# Altium PCB PCB_SD5_Keypad_v1.PcbDoc
Units mm, origin at the board's own origin, x right, y up, seen from the top; angles counter-clockwise.
Board outline 82 x 42 mm, 2 copper layers (Top Layer, Bottom Layer), stack 1.591 mm thick; 88 components, 63 nets, 280 pads, 263 vias.
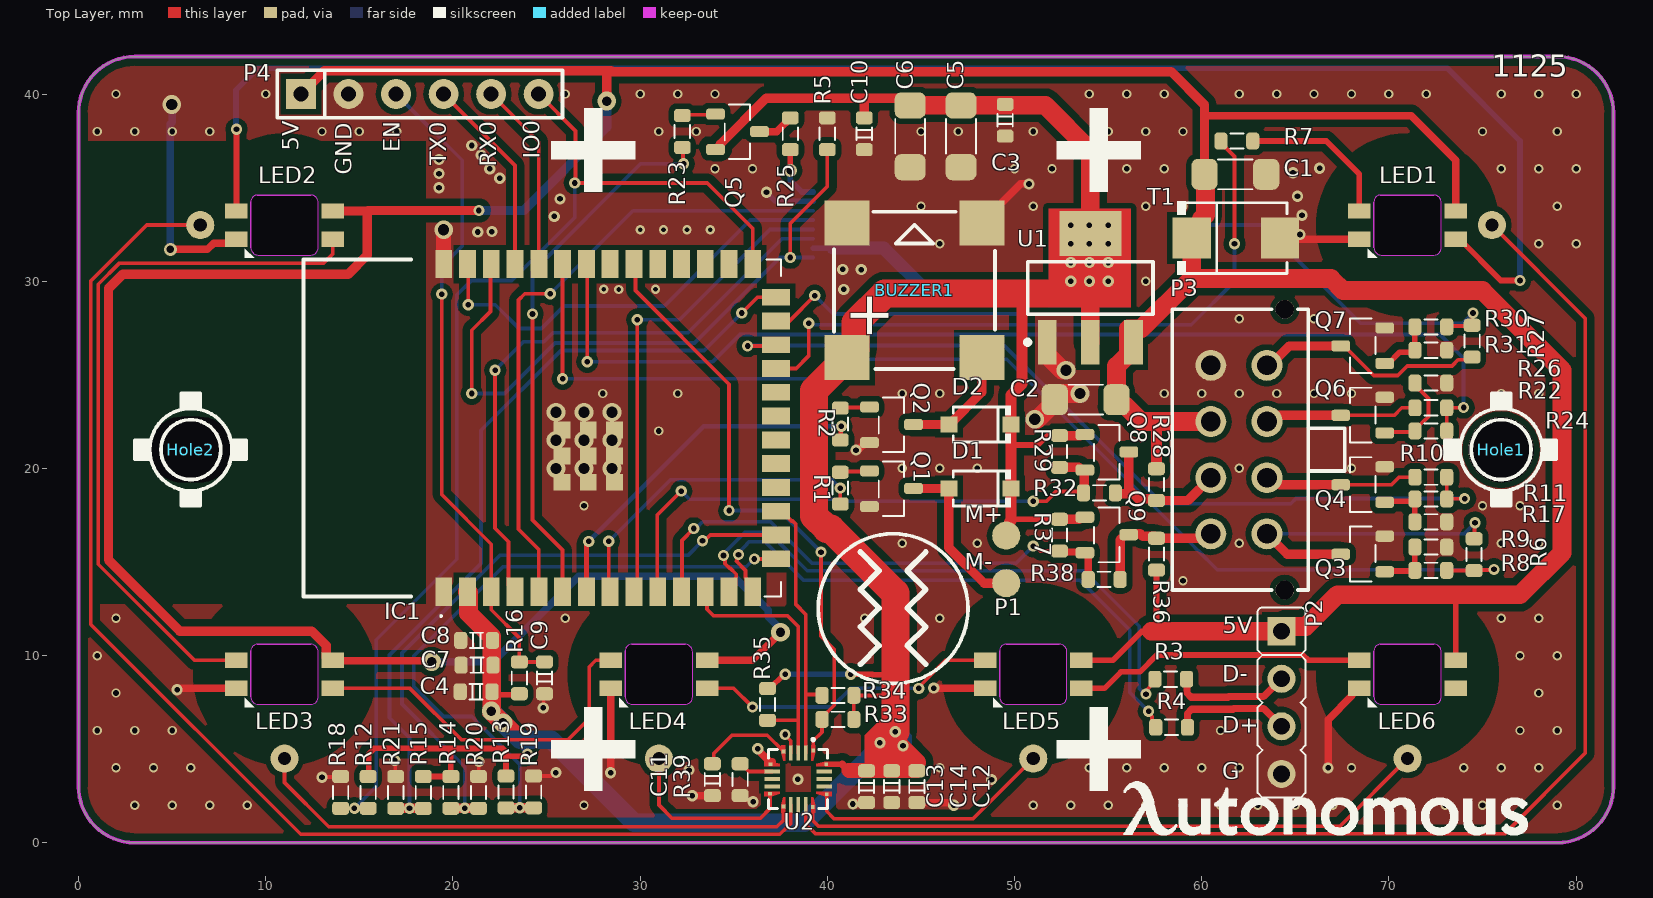
[diagram p0: Top Layer view]
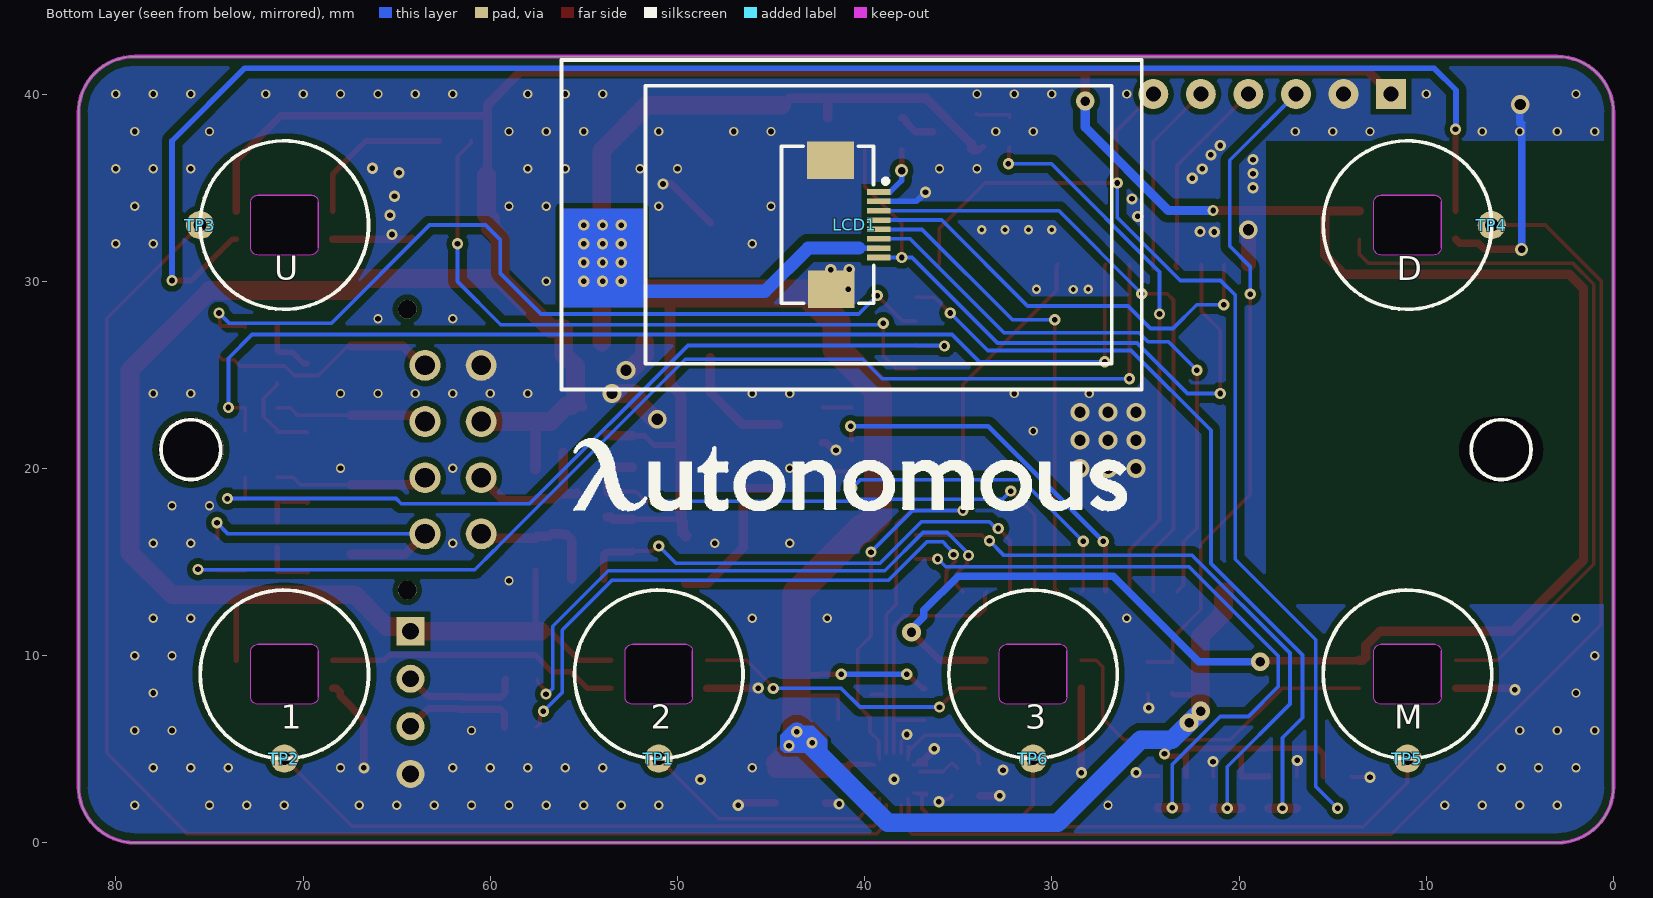
[diagram p1: Bottom Layer view, seen from below]

## Layer stack, top to bottom
Top Solder: solder mask 0.0102, Solder Resist, Dk 3.5
Top Layer: signal copper 0.0356
Dielectric 1: dielectric 1.52, FR-4, Dk 4.8
Bottom Layer: signal copper 0.0356
Bottom Solder: solder mask 0.0102, Solder Resist, Dk 3.5

## Board outline
-0.004,3.004 -0.004,39.004 cw(c2.996,39.004) 2.996,42.004 78.996,42.004 cw(c78.996,39.004) 81.996,39.004 81.996,3.004 cw(c78.996,3.004) 78.996,0.004 2.996,0.004 cw(c2.996,3.004)

## Design rules (kind name [scope] priority, off if disabled: settings)
Clearance [All] p1: gap=0.2 ignorepadtopadclearanceinfootprint=FALSE except(0.3: SMDPad-Poly THPad-Poly Via-Poly Fill-Poly; 0.4: Arc-Poly Track-Poly Poly-Poly)
DiffPairsRouting [All] p1: maxlimit=0.3 minlimit=0.3 mostfreqgap=0.3 toplayer_minwidth=0.2 toplayer_maxwidth=0.2 toplayer_prefwidth=0.2 bottomlayer_minwidth=0.2 bottomlayer_maxwidth=0.2 bottomlayer_prefwidth=0.2 maxuncoupledlength=12.7
HoleSize [All] p1: absolutevalues=TRUE maxlimit=6 minlimit=0.025 maxpercent=80.000 minpercent=20.000
HoleToHoleClearance [All] p1: gap=0.05 allowstackedmicrovias=TRUE
MinimumSolderMaskSliver [All] p1: minsoldermaskwidth=0.05
PlaneConnect [All] p1: planeconnectstyle=Direct reliefexpansion=0.508 reliefentries=4 reliefconductorwidth=0.254 reliefairgap=0.254
PolygonConnect [All] p1: connectstyle=Direct reliefconductorwidth=0.254 reliefentries=4 polygonreliefangle="90 Angle" airgapwidth=0.254
RoutingVias [All] p1: holewidth=0.3 width=0.6 viastyle="Through Hole" minholewidth=0.3 minwidth=0.6 maxholewidth=0.6 maxwidth=1
SilkToSilkClearance [All] p1: silktosilkclearance=0.005
SilkToSolderMaskClearance [IsPad] p1: minsilkscreentomaskgap=0 clearancetoexposedcopper=TRUE
SolderMaskExpansion [All] p1: expansion=0.005 istentingtop=FALSE
Width [All] p1: maxlimit=5 minlimit=0.2 preferedwidth=0.2 minimp=50.000000 maximp=50.000000 favimp=50.000000
23 further rules are at their usual default settings.

## Classes and differential pairs
differential pair USBDR: +USBDR_P -USBDR_N
differential pair USBD: +USBD_P -USBD_N

## Components (designator, comment, footprint, x,y, rotation, side; value= is the part's Value field where it differs from the comment)
BUZZER1 "2731Hz/NC" BUZ-SMD_4P-L8.5-W8.5-P8.50-TL 44.653,29.515 r90 top
C1 "22uF" C-1206 61.798,35.712 r180 top value=33pF
C2 "22uF" C-1206 53.797,23.673 r0 top value=33pF
C3 "10uF" C-0603-2 49.5,38.6 r90 top value=33pF
C4 "0.1uF" C-0603-2 21.238,8.072 r0 top value=33pF
C5 "22uF" C-1206 47.142,37.744 r90 top value=33pF
C6 "22uF" C-1206 44.425,37.744 r90 top value=33pF
C7 "10uF" C-0603-2 21.288,9.494 r0 top value=33pF
C8 "0.1uF" C-0603-2 21.263,10.815 r0 top value=33pF
C9 "1uF" C-0603-2 24.892,8.814 r90 top value=33pF
C10 "0.1uF" C-0603-2 41.971,37.879 r90 top value=33pF
C11 "0.1uF" C-0603-2 33.858,3.373 r270 top value=33pF
C12 "10uF" C-0603-2 44.78,3 r90 top value=33pF
C13 "0.1uF" C-0603-2 42.094,3 r90 top value=33pF
C14 "10uF" C-0603-2 43.44,3 r90 top value=33pF
D1 "1N5819" SOD-123_L2.7-W1.7-LS3.8-RD 48.15,18.928 r180 top value=1N5007
D2 "1N5819" SOD-123_L2.7-W1.7-LS3.8-RD 48.15,22.347 r180 top value=1N5007
Hole1 "Hole" "HOLE 2.6mm"#1 75.996,21.004 r90 top
Hole2 "Hole" "HOLE 2.6mm"#2 5.996,21.004 r180 top
IC1 "ESP32-S3-WROOM-1/NC" ESP32S3WROOM1N8R2 24.767,22.161 r90 top locked
LCD1 "LCD-N114-8P" "LCD-SMD_1.14IPS-LCD - 8PIN" 40.801,33.017 r0 bottom locked
LED1 "SK6812MINI-EA" LED-SMD_4P-L3.2-W2.8_SK6812MINI-EA 71,33 r180 top
LED2 "SK6812MINI-EA" LED-SMD_4P-L3.2-W2.8_SK6812MINI-EA 11,33 r180 top locked
LED3 "SK6812MINI-EA" LED-SMD_4P-L3.2-W2.8_SK6812MINI-EA 11,9 r180 top
LED4 "SK6812MINI-EA" LED-SMD_4P-L3.2-W2.8_SK6812MINI-EA 31,9 r180 top
LED5 "SK6812MINI-EA" LED-SMD_4P-L3.2-W2.8_SK6812MINI-EA 51,9 r180 top
LED6 "SK6812MINI-EA" LED-SMD_4P-L3.2-W2.8_SK6812MINI-EA 71,9 r180 top
P1 "VIBRA/NC" "PAD 2.54" 49.555,16.408 r270 top
P2 "MHDR1X4/NC" HDR1X4 64.262,11.303 r270 top
P3 "BX-MX3.0-2-4PWZ/NC" CONN-TH_8P-P3.00_BX-MX3.0-2-4PZZ 62.896,21.004 r270 top locked
P4 "JP6/NC" JP6-D1T 11.88,40 r0 top
Q1 "8050" SOT-23-V2 42.252,19.863 r270 top
Q2 "8050" SOT-23-V2 42.252,23.282 r270 top
Q3 "8050/NC" SOT-23-V2 69.774,14.482 r90 top
Q4 "8050/NC" SOT-23-V2 69.774,18.191 r90 top
Q5 "A1015" SOT-23-V2 34.025,38.934 r270 top
Q6 "8050/NC" SOT-23-V2 69.774,21.9 r90 top
Q7 "8050/NC" SOT-23-V2 69.774,25.608 r90 top
Q8 "BS138/NC" SOT-23-V2 53.761,21.814 r270 top
Q9 "BS138/NC" SOT-23-V2 53.761,17.395 r270 top
R1 "220" R-0603-2 40.691,18.948 r270 top
R2 "220" R-0603-2 40.691,22.372 r270 top
R3 "22R" R-0603-2 58.344,8.738 r0 top
R4 "22R" R-0603-2 58.395,6.172 r0 top
R5 "10k" R-0603-2 39.996,37.879 r90 top
R6 "0R" R-0603-2 74.549,15.392 r270 top
R7 "220" R-0603-2 61.874,37.49 r0 top
R8 "220/NC" R-0603-2 72.238,14.554 r0 top
R9 "10k/NC" R-0603-2 72.238,15.799 r0 top
R10 "0R" R-0603-2 72.238,19.533 r0 top
R11 "220/NC" R-0603-2 72.238,18.364 r0 top
R12 "10k" R-0603-2 15.469,2.692 r270 top
R13 "10k/NC" R-0603-2 22.835,2.718 r270 top
R14 "10k/NC" R-0603-2 19.888,2.692 r270 top
R15 "10k/NC" R-0603-2 18.415,2.692 r270 top
R16 "10k" R-0603-2 23.546,8.814 r90 top
R17 "10k/NC" R-0603-2 72.238,17.145 r0 top
R18 "10k/NC" R-0603-2 13.995,2.692 r90 top
R19 "10k/NC" R-0603-2 24.308,2.718 r90 top
R20 "10k" R-0603-2 21.361,2.692 r90 top
R21 "10k" R-0603-2 16.942,2.692 r90 top
R22 "0R" R-0603-2 72.238,23.241 r0 top
R23 "220" R-0603-2 32.25,38 r270 top
R24 "220/NC" R-0603-2 72.238,22.002 r0 top
R25 "33R" R-0603-2 38.021,37.879 r270 top
R26 "10k/NC" R-0603-2 72.238,24.562 r0 top
R27 "0R" R-0603-2 74.447,26.797 r90 top
R28 "10k/NC" R-0603-2 57.582,19.135 r270 top
R29 "10k/NC" R-0603-2 52.4,20.904 r270 top
R30 "220/NC" R-0603-2 72.238,27.559 r0 top
R31 "10k/NC" R-0603-2 72.238,26.314 r0 top
R32 "0R" R-0603-2 54.534,18.694 r0 top
R33 "10k" R-0603-2 40.564,6.594 r180 top
R34 "2k2" R-0603-2 40.564,7.873 r180 top
R35 "2k2" R-0603-2 36.805,7.391 r270 top
R36 "10k/NC" R-0603-2 57.582,15.418 r90 top
R37 "10k/NC" R-0603-2 52.4,16.434 r270 top
R38 "0R" R-0603-2 54.788,14.072 r0 top
R39 "75k" R-0603-2 35.339,3.373 r270 top
T1 "TVS Diode" SMB_L4.6-W3.6-LS5.3-RD 61.821,32.304 r0 top
TP1 "2/NC" "TOUCH PAD - 9MM" 51,9 r0 bottom
TP2 "1/NC" "TOUCH PAD - 9MM" 71,9 r0 bottom
TP3 "UP/NC" "TOUCH PAD - 9MM" 71,33 r90 bottom locked
TP4 "DN/NC" "TOUCH PAD - 9MM" 11,33 r270 bottom locked
TP5 "M/NC" "TOUCH PAD - 9MM" 11,9 r0 bottom locked
TP6 "3/NC" "TOUCH PAD - 9MM" 31,9 r0 bottom locked
U1 "LM1117-3.3V-800mA" "SOT223-LM1117 - duplicate" 54.051,29.642 r90 top
U2 "MPR121QR2" QFN-20_L3.0-W3.0-P0.40-BL 38.439,3.411 r180 top

## Footprints (in the part's own frame and the unit in brackets; to place one, negate y for a bottom-side part, rotate by r counter-clockwise, add the part's x,y. Pads: shape width x height; smd on the part's side, far side on the other; paste and mask are expansions set on the pad)
BUZ-SMD_4P-L8.5-W8.5-P8.50-TL [mm]
  rect 2.4x2.4 smd paste+0 mask+0.051: 1(-3.6,3.6) 2(-3.6,-3.6) 3(3.6,-3.6) 4(3.6,3.6)
  silkscreen extent -4.2,-4.3 4.2,4.3, body extent -4.35,-4.35 4.35,4.35, height 3
C-0603-2 [mm]
  rrect50% 0.7x0.9 smd: 1(-0.85,0) 2(0.85,0)
  silkscreen extent -0.35,-0.41 0.35,0.41, body extent -0.8,-0.4 0.8,0.4, height 0.3
C-1206 [mm]
  rrect50% 1.4x1.651 smd: 1(-1.65,0) 2(1.65,0)
  silkscreen extent -0.92,-0.8 0.92,0.8, body extent -1.57,-0.8 1.63,0.8, height 1.02
CONN-TH_8P-P3.00_BX-MX3.0-2-4PZZ [mm]
  round 1.65 hole 1.05 paste+0 mask+0.05: 1(4.5,-2.41) 2(1.5,-2.41) 3(-1.5,-2.41) 4(-4.5,-2.41) 5(4.5,0.59) 6(1.5,0.59) 7(-1.5,0.59) 8(-4.5,0.59)
  round 1 hole 1 unplated paste+0: ""(-7.5,1.539) ""(7.5,1.539)
  silkscreen extent -7.5,-4.47 7.5,4.74
ESP32S3WROOM1N8R2 [mm]
  rect 1.5x0.9 smd: 1(-8.75,5.26) 2(-8.75,3.99) 3(-8.75,2.72) 4(-8.75,1.45) 5(-8.75,0.18) 6(-8.75,-1.09) 7(-8.75,-2.36) 8(-8.75,-3.63) 9(-8.75,-4.9) 10(-8.75,-6.17) 11(-8.75,-7.44) 12(-8.75,-8.71) 13(-8.75,-9.98) 14(-8.75,-11.25) 27(8.75,-11.25) 28(8.75,-9.98) 29(8.75,-8.71) 30(8.75,-7.44) 31(8.75,-6.17) 32(8.75,-4.9) 33(8.75,-3.63) 34(8.75,-2.36) 35(8.75,-1.09) 36(8.75,0.18) 37(8.75,1.45) 38(8.75,2.72) 39(8.75,3.99) 40(8.75,5.26)
  rect 0.9x1.5 smd: 15(-6.985,-12.5) 16(-5.715,-12.5) 17(-4.445,-12.5) 18(-3.175,-12.5) 19(-1.905,-12.5) 20(-0.635,-12.5) 21(0.635,-12.5) 22(1.905,-12.5) 23(3.175,-12.5) 24(4.445,-12.5) 25(5.715,-12.5) 26(6.985,-12.5)
  rect 0.9x0.9 smd: 41(-2.9,-2.46) 41(-2.9,-1.06) 41(-2.9,-3.86) 41(-1.5,-1.06) 41(-1.5,-3.86) 41(-1.5,-2.46) 41(-0.1,-1.06) 41(-0.1,-2.46) 41(-0.1,-3.86)
  silkscreen extent -10.1,5.35 9,12.75, body extent -9,-12.75 9,12.75, height 3.2
HDR1X4 [mm] "Connector; Header; 4 Position"
  rect 1.5x1.5 hole 0.9: 1(0,0)
  round 1.5 hole 0.9: 2(2.54,0) 3(5.08,0) 4(7.62,0)
  silkscreen extent -1.27,-1.28 8.89,1.28, body extent -1.27,-1.27 8.89,1.27, height 8.57
"HOLE 2.6mm"#1 [mm]
  round 3.5 hole 3.5 mask+0.102: 1(0,0)
  Top Layer pour cut-out: -1.75,0 -1.617,0.67 -1.237,1.237 -0.67,1.617 0,1.75 0,1.75 0.67,1.617 1.237,1.237 1.617,0.67 1.75,0 1.75,0 1.617,-0.67 1.237,-1.237 0.67,-1.617 0,-1.75 0,-1.75 -0.67,-1.617 -1.237,-1.237 -1.617,-0.67 -1.75,0
  Bottom Layer pour cut-out: -1.75,0 -1.617,0.67 -1.237,1.237 -0.67,1.617 0,1.75 0,1.75 0.67,1.617 1.237,1.237 1.617,0.67 1.75,0 1.75,0 1.617,-0.67 1.237,-1.237 0.67,-1.617 0,-1.75 0,-1.75 -0.67,-1.617 -1.237,-1.237 -1.617,-0.67 -1.75,0
  silkscreen extent -1.6,-1.6 1.6,1.6
"HOLE 2.6mm"#2 [mm]
  round 3.5 hole 3.5 slot 4.5 at 0 deg mask+0.102: 1(0,0)
  Top Layer pour cut-out: -1.75,0 -1.617,0.67 -1.237,1.237 -0.67,1.617 0,1.75 0,1.75 0.67,1.617 1.237,1.237 1.617,0.67 1.75,0 1.75,0 1.617,-0.67 1.237,-1.237 0.67,-1.617 0,-1.75 0,-1.75 -0.67,-1.617 -1.237,-1.237 -1.617,-0.67 -1.75,0
  Bottom Layer pour cut-out: -1.75,0 -1.617,0.67 -1.237,1.237 -0.67,1.617 0,1.75 0,1.75 0.67,1.617 1.237,1.237 1.617,0.67 1.75,0 1.75,0 1.617,-0.67 1.237,-1.237 0.67,-1.617 0,-1.75 0,-1.75 -0.67,-1.617 -1.237,-1.237 -1.617,-0.67 -1.75,0
  silkscreen extent -1.6,-1.6 1.6,1.6
JP6-D1T [mm] "6 pins, 1 row, straight, gold plating"
  rect 1.6x1.6 hole 0.8: 1(0,0)
  round 1.6 hole 0.8: 2(2.54,0) 3(5.08,0) 4(7.62,0) 5(10.16,0) 6(12.7,0)
  silkscreen extent -1.27,-1.27 13.97,1.27, body extent -1.27,-1.27 13.97,1.27, height 8.54
"LCD-SMD_1.14IPS-LCD - 8PIN" [mm]
  rect 1.25x0.3 smd paste+0 mask+0.05: 1(-1.558,-1.75) 2(-1.558,-1.25) 3(-1.558,-0.75) 4(-1.558,-0.25) 5(-1.558,0.25) 6(-1.558,0.75) 7(-1.558,1.25) 8(-1.558,1.75)
  rect 2.5x2 smd paste+0 mask+0.05: 9(0.982,3.44) 10(1.018,-3.44)
  silkscreen extent -15.6,-8.8 15.4,8.8, body extent -15.57,-8.8 16.09,8.8, height 6.87
LED-SMD_4P-L3.2-W2.8_SK6812MINI-EA [mm]
  rect 1.2x0.82 smd paste+0 mask+0.051: 1(-2.575,-0.75) 2(-2.575,0.75) 3(2.575,0.75) 4(2.575,-0.75)
  Keep-Out Layer board cut-out: 1.8,1.2 1.746,1.4 1.6,1.546 1.4,1.6 1.4,1.6 -1.4,1.6 -1.599,1.546 -1.745,1.399 -1.8,1.2 -1.8,1.2 -1.8,-1.2 -1.746,-1.4 -1.6,-1.547 -1.4,-1.6 -1.4,-1.6 1.45,-1.6 1.625,-1.553 1.753,-1.425 1.8,-1.25 1.8,-1.25
  Keep-Out Layer lines w0.05: 1.4,1.6 ccw(c1.4,1.6) 1.4,1.6 ; 1.4,1.6 cw(c1.4,1.2) 1.8,1.2 1.8,-1.25 cw(c1.45,-1.25) 1.45,-1.6 -1.4,-1.6 cw(c-1.4,-1.2) -1.8,-1.2 -1.8,1.2 cw(c-1.4,1.2) -1.4,1.6 1.4,1.6
  silkscreen extent 1.63,1.25 2.12,1.75, body extent -2.94,-1.4 2.94,1.4, height 0.89
"PAD 2.54" [mm]
  round 1.5 smd paste+0 mask+0.05: 1(0,0) 2(2.54,0)
QFN-20_L3.0-W3.0-P0.40-BL [mm]
  rect 0.2x0.2 smd paste+0 mask+0.051: 1(-0.813,-1.524) 5(0.787,-1.473) 6(1.473,-0.787) 10(1.499,0.787) 11(0.787,1.473) 15(-0.787,1.499) 16(-1.524,0.813) 20(-1.499,-0.787)
  rect 0.2x0.825 smd paste+0 mask+0.051: 2(-0.4,-1.388) 3(0,-1.388) 4(0.4,-1.388) 12(0.4,1.388) 13(0,1.388) 14(-0.4,1.388)
  rect 0.825x0.2 smd paste+0 mask+0.051: 7(1.388,-0.4) 8(1.388,0) 9(1.388,0.4) 17(-1.388,0.4) 18(-1.388,0) 19(-1.388,-0.4)
  Top Layer region: -0.688,-1.8 -0.688,-0.975 -0.8,-0.975 -0.912,-1.388 -0.912,-1.8
  Top Layer region: -1.8,0.688 -0.975,0.688 -0.975,0.8 -1.388,0.912 -1.8,0.912
  Top Layer region: 0.688,1.8 0.688,0.975 0.8,0.975 0.912,1.388 0.912,1.8
  Top Layer region: 1.8,-0.688 0.975,-0.688 0.975,-0.8 1.388,-0.912 1.8,-0.912
  Top Layer region: 1.8,0.688 0.975,0.688 0.975,0.8 1.388,0.912 1.8,0.912
  Top Layer region: -0.688,1.8 -0.688,0.975 -0.8,0.975 -0.912,1.388 -0.912,1.8
  Top Layer region: -1.8,-0.688 -0.975,-0.688 -0.975,-0.8 -1.388,-0.912 -1.8,-0.912
  Top Layer region: 0.688,-1.8 0.688,-0.975 0.8,-0.975 0.912,-1.388 0.912,-1.8
  silkscreen extent -1.58,-2.17 1.58,1.58, body extent -1.55,-1.55 1.55,1.55, height 0.6
R-0603-2 [mm]
  rrect50% 0.7x0.9 smd: 1(-0.85,0) 2(0.85,0)
  silkscreen extent -0.35,-0.41 0.35,0.41, body extent -0.8,-0.4 0.8,0.4, height 0.43
SMB_L4.6-W3.6-LS5.3-RD [mm]
  rect 2.047x2.192 smd paste+0 mask+0.051: 1(-2.361,0) 2(2.361,0)
  silkscreen extent -3.12,-1.96 2.74,1.96, body extent -2.7,-1.8 2.7,1.8, height 2.3
SOD-123_L2.7-W1.7-LS3.8-RD [mm]
  rect 0.91x0.84 smd paste+0 mask+0.051: 1(1.655,0) 2(-1.655,0)
  silkscreen extent -1.65,-1 1.43,1, body extent -1.95,-0.9 1.95,0.9, height 1.18
"SOT223-LM1117 - duplicate" [mm]
  rect 2.4x1 smd: 1(-2.9,2.3) 2(-2.9,0) 3(-2.9,-2.3)
  rect 2.4x3.3 smd: 2(2.9,0)
  silkscreen extent -3.02,-3.35 1.4,3.47, body extent -3.39,-3.27 3.5,3.23, height 1.72
SOT-23-V2 [mm]
  rrect50% 0.6x1 smd: 1(0,0) 2(1.9,0) 3(0.935,2.348)
  silkscreen extent -0.51,0.49 2.41,1.85, body extent -0.54,-0.1 2.46,2.4, height 1.09
"TOUCH PAD - 9MM" [mm]
  round 1.5 hole 0.7 mask+0.102: 1(0,4.5)
  Top Layer pour cut-out: -4.9,0 -4.527,1.875 -3.465,3.465 -1.875,4.527 0,4.9 0,4.9 1.875,4.527 3.465,3.465 4.527,1.875 4.9,0 4.9,0 4.527,-1.875 3.465,-3.465 1.875,-4.527 0,-4.9 0,-4.9 -1.875,-4.527 -3.465,-3.465 -4.527,-1.875 -4.9,0
  Bottom Layer pour cut-out: -4.9,0 -4.527,1.875 -3.465,3.465 -1.875,4.527 0,4.9 0,4.9 1.875,4.527 3.465,3.465 4.527,1.875 4.9,0 4.9,0 4.527,-1.875 3.465,-3.465 1.875,-4.527 0,-4.9 0,-4.9 -1.875,-4.527 -3.465,-3.465 -4.527,-1.875 -4.9,0
  silkscreen extent -4.5,-4.5 4.5,4.5

## Part data
BUZZER1: library part KLJ-7525-3627
C1 C2 C5 C6: library part CN, LCSC=C12891, MPN=CL31A226KAHNNNE
C3 C7 C12 C14: library part CN, LCSC=C19702, MPN=CL10A106KP8NNNC
C4 C8 C10 C11 C13: library part CN, LCSC=C14663, MPN=CC0603KRX7R9BB104
C9: library part CN, LCSC=C15849, MPN=CL10A105KB8NNNC
D1 D2: library part "Diode SMD", "Default Diode", LCSC=C82544, MPN=1N5819HW-7-F, Code - JEDEC=DO-214-AB, Published=8-Jun-2000, Publisher="Altium Limited", Revision="July-2002: Re-released for DXP Platform."
IC1: library part ESP32-S3-WROOM-1, "Integrated Circuit", LCSC=C2913204, Manufacturer_Name="Espressif Systems", Manufacturer_Part_Number=ESP32-S3-WROOM-1-N8R2, Mouser Part Number=356-ESP32-S3WRM1N8R2, Datasheet Link=https://www.mouser.com/catalog/specsheets/Espressif_ESP32_S3_WROOM_1_1U_Preliminary.pdf, Height=3.25mm, Mouser Price/Stock=https://www.mouser.co.uk/ProductDetail/Espressif-Systems/ESP32-S3-WROOM-1-N8R2?qs=Wj%2FVkw3K%252BMCC1Ha9x85iJA%3D%3D, MPN=ESP32-S3-WROOM-1-N8R2
LCD1: LCSC=C262555, MPN=AFC07-S08FCA-00
LED1 LED2 LED3 LED4 LED5 LED6: LCSC=C5378731, MPN=SK6812MINI-EA
P1: library part JP2, "WR-PHD 2.54 mm Angled Socket Header", Manufacturer="W¨¹rth Elektronik eiSos GmbH", partNo=613002143121, ComponentLink1 Description=Manufacturer, ComponentLink1URL=http://www.we-online.com, ComponentLink2 Description=Datasheet, ComponentLink2URL=http://katalog.we-online.de/em/datasheet/6130xx143121.pdf, Created by="Karrer Zheng", Created Date="29 March 2013", NoPins=02
P2: library part MHDR1X4, "Header, 4-Pin", LatestRevisionDate=17-Jul-2002, LatestRevisionNote="Re-released for DXP Platform.", Publisher="Altium Limited"
P3: library part BX-MX3.0-2-4PWZ
P4: library part JP6, "WR-PHD 2.54 mm Angled Socket Header", Manufacturer="W¨¹rth Elektronik eiSos GmbH", partNo=613006143121, ComponentLink1 Description=Manufacturer, ComponentLink1URL=http://www.we-online.com, ComponentLink2 Description=Datasheet, ComponentLink2URL=http://katalog.we-online.de/em/datasheet/6130xx143121.pdf, Created by="Karrer Zheng", Created Date="29 March 2013", NoPins=06
Q1 Q3 Q4 Q6 Q7: library part C1815, LCSC=C111272, MPN=S8050, PSpiceTemplate="Q^@REFDES %c %b %e @MODEL", COMPONENT=2SC1815, ComponentLink1Description="Digikey Part Link", ComponentLink2Description="Open Datasheet", ComponentLink2URL=H:\LIBRARY\LIBRARY.Datasheet\, Price=500VND, Published=13-April-2009, Publisher="Hoang Nguyen", Vendor=Digikey
Q2: library part C1815, "Q2SC1815", LCSC=C111272, MPN=S8050, PSpiceTemplate="Q^@REFDES %c %b %e @MODEL", COMPONENT=2SC1815, ComponentLink1Description="Digikey Part Link", ComponentLink2Description="Open Datasheet", ComponentLink2URL=H:\LIBRARY\LIBRARY.Datasheet\, Price=500VND, Published=13-April-2009, Publisher="Hoang Nguyen", Vendor=Digikey
Q5: "PNP SOT 23", LCSC=C545569, MPN=2SA1015
Q8 Q9: library part Si2302DS, "N-Channel MOSFET", LCSC=C24553, MPN=BSS138W-7-F, LatestRevisionDate=17-Jul-2002, LatestRevisionNote="Re-released for DXP Platform.", PackageDescription="TO, Flat Index; 3 In-Line, Axial Leads; Body Dia. 4.6mm; Lead Dia. 0.5 mm (max)", PackageReference=E3, PackageVersion=1995/1996, Published=8-Jun-2000, Publisher="Altium Limited"
R1 R2 R7 R8 R11 R23 R24 R30: library part Res-SMD, "Resistor", LCSC=C1226, Manufacturer="Generic Components", MPN=0603WAJ0221T5E, Class=Passive, Published=08/06/2000, Publisher="Altium Hobart Technology Centre"
R3 R4: library part Res-SMD, "Resistor", LCSC=C1203, Manufacturer="Generic Components", MPN=0603WAJ0220T5E, Class=Passive, Published=08/06/2000, Publisher="Altium Hobart Technology Centre"
R5 R9 R12 R13 R14 R15 R16 R17 R18 R19 R20 R21 R26 R28 R29 R31 R33 R36 R37: library part Res-SMD, "Resistor", LCSC=C15401, Manufacturer="Generic Components", MPN=0603WAJ0103T5E, Class=Passive, Published=08/06/2000, Publisher="Altium Hobart Technology Centre"
R6 R10 R22 R27 R32 R38: library part Res-SMD, "Resistor", LCSC=C15402, Manufacturer="Generic Components", MPN=0603WAJ0000T5E, Class=Passive, Published=08/06/2000, Publisher="Altium Hobart Technology Centre"
R25: library part Res-SMD, "Resistor", LCSC=C23140, Manufacturer="Generic Components", MPN=0603WAF330JT5E, Class=Passive, Published=08/06/2000, Publisher="Altium Hobart Technology Centre"
R34 R35: library part Res-SMD, "Resistor", LCSC=C4190, Manufacturer="Generic Components", MPN=0603WAF2201T5E, Class=Passive, Published=08/06/2000, Publisher="Altium Hobart Technology Centre"
R39: library part Res-SMD, "Resistor", LCSC=C18671, Manufacturer="Generic Components", MPN=0603WAJ0753T5E, Class=Passive, Published=08/06/2000, Publisher="Altium Hobart Technology Centre"
T1: LCSC=C10204, MPN=SMBJ5.0A
TP1 TP2 TP3 TP4 TP5 TP6: library part JP1, "WR-PHD 2.54 mm Angled Socket Header", Manufacturer="W¨¹rth Elektronik eiSos GmbH", partNo=613002143121, ComponentLink1 Description=Manufacturer, ComponentLink1URL=http://www.we-online.com, ComponentLink2 Description=Datasheet, ComponentLink2URL=http://katalog.we-online.de/em/datasheet/6130xx143121.pdf, Created by="Karrer Zheng", Created Date="29 March 2013", NoPins=02
U1: library part LM1117, "800mA Low-Dropout Linear Regulator", LCSC=C9662, MPN=LM1117MPX-3.3/NOPB, Creator="Nguyen Ba Bien", Website=http://group3i.net
U2: LCSC=C91322, MPN=MPR121QR2

## Via types
v1: diameter 0.5, hole 0.3, Top Layer to Bottom Layer, tented both sides, 130 vias
v2: diameter 0.6, hole 0.3, Top Layer to Bottom Layer, tented both sides, 105 vias
v3: diameter 1, hole 0.6, Top Layer to Bottom Layer, 9 vias
v4: diameter 0.5, hole 0.25, Top Layer to Bottom Layer, tented both sides, 7 vias
v5: diameter 1, hole 0.6, Top Layer to Bottom Layer, tented both sides, 5 vias
v6: diameter 1, hole 0.5, Top Layer to Bottom Layer, tented both sides, 5 vias
v7: diameter 0.7, hole 0.4, Top Layer to Bottom Layer, tented both sides, 2 vias

## Nets (pads, with @x,y where several pads share a name; then routed paths per layer and width w, separated by ;. In a path a pad name is that pad's centre, name@x,y a point inside that pad or via, vN(x,y) a via of type N, cw(c..) or ccw(c..) an arc to the next point about the centre after c; other vN are vias at no path point)
+3.3V: BUZZER1.1 C3.2 C4.2 C5.2 C6.2 C7.2 C8.2 C10.2 C12.2 C13.2 C14.2 D1.2 D2.2 IC1.2 LCD1.7 P1.1 Q5.2 Q8.1 Q9.1 R12.1 R13.1 R14.1 R15.1 R16.1 R29.1 R33.1 R34.1 R35.1 R37.1 U1.2 U2.20 | length 177.1
  Top Layer w0.2: R33.1 R34.1 43.333,7.873 ; 49.805,21.229 49.825,21.25
  Top Layer w0.3: R12.1 15.5,3.574 15.5,4.75 15.802,5.052 18.411,5.052 18.424,5.039 19.888,5.039 ; R15.1 R14.1 19.888,5.039 ; C4.2@22.11,7.913 23.495,7.913 R16.1 ; R13.1 22.835,4.626 ; v2(23.978,4.748) 23.857,4.626 22.835,4.626 ; Q5.2@33.675,37.191 33.675,37.184 33.825,37.034 Q5.2 ; R35.1 36.918,8.241 37.677,9 v2(37.75,9) ; U2.20 40.802,4.198 ; v2(41.25,9) 42.414,9 42.433,8.981 43.459,8.981 ; P1.1@49.728,17.133 49.805,17.21 49.879,17.284 R37.1 ; 49.825,21.25 51.25,21.25 51.754,21.754 R29.1 ; 19.888,5.039 22.659,5.039 22.835,4.863 22.835,4.626
  Top Layer w0.4: 40.802,4.198 40.999,4 41.15,3.85
  Top Layer w0.5: v6@22.073,7.061 22.11,7.098 C4.2@22.11,7.913 ; Q5.2 34.225,37.034 34.275,37.084 34.275,37.323 36.728,39.776 41.91,39.776 ; C10.2 41.971,39.715 41.91,39.776 ; C6.2 44.043,39.776 41.91,39.776 ; R37.1 53.45,17.284 53.561,17.395 Q9.1 ; R29.1 53.501,21.754 53.561,21.814 Q8.1
  Top Layer w0.6: P1.1 49.728,16.581 P1.1@49.728,17.133 ; 49.805,17.21 D1.2 49.805,21.229 D2.2 49.805,23.918 50.394,24.507 50.394,29.35
  Top Layer w0.8: 41.15,3.85 C13.2 C14.2 C12.2 44.78,4.285
  Top Layer w1: IC1.2 20.827,13.361 20.827,12.269 22.073,11.024 22.073,7.061 v6(22.047,7.036) ; 43.601,5.464 44.78,4.285 ; C6.2 C5.2 51.639,39.394 54.051,36.982 54.051,32.542 54.077,32.516 54.077,29.464 ; 53.464,29.464 54.077,29.464 ; U1.2@54.051,26.742 54.051,29.439 54.077,29.464
  Top Layer w1.5: v2(43.629,5.928) 43.629,13.33 40.18,16.779 39.969,16.779 39.291,17.457 39.291,24.152 BUZZER1.1 41.503,26.365 41.503,27.787 43.066,29.35 50.394,29.35 53.35,29.35 53.464,29.464
  Bottom Layer w0.3: 23.583,5.5 23.583,5.224 23.978,4.829 v2(23.978,4.748) ; v2(37.75,9) v2(41.25,9) ; LCD1.7 40.154,31.767 ; 52.399,29.464 54.077,29.464
  Bottom Layer w0.7: 40.296,31.767 43.02,31.767 45.323,29.464 52.399,29.464
  Bottom Layer w1: v6(22.047,7.036) 22.662,6.421 v6(22.666,6.421) 23.583,5.504 23.583,5.5 25.25,5.5 29.681,1.069 38.771,1.069 v2(43.629,5.928)
  other v2: 44.039,5.188 42.805,5.349 53,30 54,30 55,30 53,31 54,31 55,31 53,32 54,32 55,32 53,33 54,33 55,33
+5V: C1.2 C2.2 LED1.1 LED2.1 LED3.1 LED4.1 LED5.1 LED6.1 P2.1 P3.3 P4.1 R28.1 R36.1 T1.1 U1.3 | length 257.7
  Top Layer w0.3: LED5.1 55.25,9.75 56.803,11.303 57.303,11.303 57.582,11.582 R36.1 ; LED6.1 73.575,13.097 73.728,13.25
  Top Layer w0.4: LED3.1 13.611,9.714 18.836,9.714 v6(18.872,9.677) ; LED4.1@33.575,9.75 36,9.75 v6(37.5,11.25) ; 60.148,38.837 71.196,38.837 73.575,36.458 LED1.1
  Top Layer w0.5: P4.1 13.13,41.25 28.449,41.25 28.5,41.199 58.369,41.199 60.148,39.42 60.148,38.837 C1.2@60.148,35.382 ; LED3.1 13.385,9.75 13.225,9.91 13.225,10.542 12.464,11.303 5.41,11.303 1.6,15.113 1.6,29.616 2.35,30.366 14.39,30.366 15.423,31.4 15.423,33.75 ; LED2.1 15.423,33.75 ; v2(21.387,33.782) 15.455,33.782 15.423,33.75 ; v6(28.219,39.624) 28.219,41.199 ; C2.2@55.067,23.293 C2.2
  Top Layer w0.6: 57.277,22.504 57.582,22.2 R28.1
  Top Layer w1: C2.2@55.447,23.547 55.647,23.347 55.925,23.347 56.768,22.504 57.277,22.504 P3.3 ; C2.2 55.447,25.469 56.033,26.054 56.071,26.054 56.071,27.454 56.771,27.454 59.46,30.144 ; 57.303,11.303 P2.1 64.512,11.553 65.553,11.553 67.25,13.25 73.728,13.25 77,13.25 79.25,15.5 79.25,25.25 75,29.5 67.552,29.5 66.908,30.144 59.46,30.144 ; C1.2@60.198,35.663 60.198,33.536 59.984,33.322 59.984,32.828 T1.1 59.46,30.144
  Bottom Layer w0.4: v6(18.872,9.677) 22.145,9.677 26.717,14.25 35,14.25 36.831,12.419 36.831,12.082 37.5,11.412 v6(37.5,11.25)
  Bottom Layer w0.5: v2(21.387,33.782) 23.774,33.782 28.219,38.227 v6(28.219,39.624)
BUZZ: IC1.7 R2.2 | length 19.5
  Top Layer w0.254: IC1.7 27.127,15.978 v2(27.25,16.101) ; R2.2 40.72,21.551 40.72,22.22 v2(40.75,22.25)
  Bottom Layer w0.254: v2(27.25,16.101) 33.399,22.25 v2(40.75,22.25)
CB_K1: P3.8 Q7.3 R27.1 | length 12.5
  Top Layer w0.2: Q7.3 67.614,26.544 69.19,24.968 70.471,24.968 70.979,25.476 73.371,25.476 73.697,25.802 74.303,25.802 R27.1
  Top Layer w0.5: P3.8 63.635,25.504 64.674,26.544 Q7.3
CB_K2: P3.7 Q6.3 R22.1 | length 8.2
  Top Layer w0.2: Q6.3 70.282,22.835 70.688,23.241 R22.1
  Top Layer w0.5: P3.7 63.797,22.504 64.127,22.835 Q6.3
CB_K3: P3.6 Q4.3 R10.1 | length 8.2
  Top Layer w0.2: Q4.3 70.136,19.126 70.542,19.533 R10.1
  Top Layer w0.5: P3.6 63.797,19.504 64.175,19.126 Q4.3
CB_K4: P3.5 Q3.3 R6.1 | length 16.6
  Top Layer w0.2: R6.1 74.574,16.268 74.574,17.069 v2(74.6,17.094)
  Top Layer w0.5: P3.5 64.572,15.418 Q3.3
  Bottom Layer w0.2: P3.5 74.01,16.504 v2(74.6,17.094)
CB_RX: P3.1 Q9.3 R36.2 R38.2 | length 7.3
  Top Layer w0.5: R38.2 55.638,16.188 55.909,16.459 Q9.3 56.159,16.509 56.717,16.509 ; 56.718,16.51 56.86,16.368 57.482,16.368 R36.2 59.938,16.268 60.174,16.504 P3.1
CB_TX: P3.2 Q8.3 R28.2 R32.2 | length 8.1
  Top Layer w0.5: R32.2 55.435,18.644 56.337,18.644 ; Q8.3 56.109,18.872 56.337,18.644 ; P3.2 59.266,18.285 R28.2 57.482,18.385 56.596,18.385 56.337,18.644
CS_LCD: IC1.38 LCD1.8 R5.1 | length 35.2
  Top Layer w0.2: v2(21,24) 21,27.384 22,28.384 22,30.864 IC1.38 ; v2(38.024,31.267) 38.024,33.094 39.996,35.066 R5.1
  Bottom Layer w0.2: v2(21,24) 22.75,24 25.455,26.705 32.902,26.705 37.465,31.267 v2(38.024,31.267) LCD1.8
DC: IC1.39 LCD1.4 | length 23.5
  Top Layer w0.2: IC1.39 20.82,30.868 v2(20.82,28.745)
  Bottom Layer w0.2: v2(20.82,28.745) 22.255,28.745 23.528,27.472 24.722,27.472 25.927,28.677 31.293,28.677 35.884,33.267 LCD1.4
ESP_EN: C9.2 IC1.3 P4.3 R16.2 | length 35.3
  Top Layer w0.2: v2(19.406,29.312) 19.406,18.594 22.047,15.953 IC1.3 22.047,12.446 23.546,10.947 R16.2 C9.2
  Bottom Layer w0.2: P4.3 20.5,36.46 20.5,31.882 19.406,30.788 v2(19.406,29.312)
ESP_IO0: IC1.27 P4.6 R12.2 R18.1 | length 57.6
  Top Layer w0.2: P4.6 26.547,38.033 26.547,35.297 v2(26.5,35.25) 33.584,35.25 36.017,32.817 IC1.27
  Bottom Layer w0.2: v2(14.732,1.842) 15.9,3.01 15.9,10.845 20.204,15.15 20.204,29.262 20.982,30.04 23.139,30.04 26.5,33.4 v2(26.5,35.25)
ESP_IO3: IC1.15 R13.2 R19.1 | length 34.3
  Top Layer w0.2: v2(36.104,15.161) 37.252,15.161 IC1.15
  Top Layer w0.5: R13.2 v2(23.571,1.868) R19.1
  Bottom Layer w0.2: v2(23.571,1.868) 23.571,4.179 21,6.75 19.5,6.75 17.907,8.343 17.907,9.982 22.675,14.75 35.667,14.75 36.078,15.161 v2(36.104,15.161)
ESP_IO45: IC1.26 R15.2 R21.1 | length 42.8
  Top Layer w0.2: v2(35.425,28.304) 36.267,29.146 IC1.26
  Top Layer w0.5: R21.1 v2(17.678,1.842) R15.2
  Bottom Layer w0.2: v2(17.678,1.842) 17.678,5.613 16.608,6.684 16.608,10.036 21.5,14.928 21.5,22.037 25.768,26.305 33.426,26.305 v2(35.425,28.304)
ESP_IO46: IC1.16 R14.2 R20.1 | length 33.8
  Top Layer w0.2: v2(33.33,16.137) 33.439,16.137 33.748,16.446 IC1.16
  Top Layer w0.5: R14.2 v2(20.625,1.842) R20.1
  Bottom Layer w0.2: v2(20.625,1.842) 20.625,4.064 17.272,7.417 17.272,10.135 22.493,15.356 32.549,15.356 v2(33.33,16.137)
ESP_RX0: IC1.36 P4.5 | length 10.4
  Top Layer w0.2: P4.5 24.587,37.453 IC1.36 IC1.36@24.587,30.683
ESP_TX0: IC1.37 P4.4 | length 10.9
  Top Layer w0.2: P4.4 23.317,36.183 IC1.37 ; IC1.37@23.317,30.683 23.408,30.774 IC1.37@23.408,30.911
GND: BUZZER1.3 BUZZER1.4 C1.1 C2.1 C3.1 C4.1 C5.1 C6.1 C7.1 C8.1 C9.1 C10.1 C11.2 C12.1 C13.1 C14.1 IC1.1 IC1.40 IC1.41 LCD1.2 LCD1.9 LCD1.10 LED1.3 LED2.3 LED3.3 LED4.3 LED5.3 LED6.3 P2.4 P3.4 P4.2 Q1.2 Q2.2 Q3.2 Q4.2 Q6.2 Q7.2 R5.2 R9.2 R17.2 R18.2 R19.2 R20.2 R21.2 R26.2 R31.2 R39.2 T1.2 U1.1 U2.4 U2.6 | length 57
  Top Layer w0.2: v2(13,3.5) 13.021,3.521 13.974,3.521 R18.2 ; v2(16.895,4.402) 16.918,4.378 16.918,3.566 R21.2 ; R20.2 21.376,3.557 21.376,4.322 v2(21.391,4.336) ; R19.2 25.21,3.568 25.392,3.75 v2(25.5,3.75) ; v2(24.818,7.207) 24.855,7.244 24.855,7.927 C9.1 ; R39.2 35.543,2.319 35.8,2.319 35.924,2.196 v2(36.032,2.196) ; v2(37.742,5.788) 37.742,5.745 38.039,5.448 U2.4
  Top Layer w0.4: v7(4.902,31.699) 6.884,31.699 7.225,32.04 8.215,32.04 LED2.3 ; v2(5.26,8.174) 5.336,8.25 LED3.3 ; v2(28.42,3.744) 28.425,3.749 LED4.3 ; v2(32.787,2.518) 32.791,2.523 C11.2 ; v2(36.277,5.024) 36.277,4.97 36.845,4.402 36.845,4.323 37.051,4.323 ; v2(41.363,2.071) 41.401,2.11 42.053,2.11 C13.1 ; v2(41.532,20.979) 41.57,21.017 41.687,21.017 42.052,21.382 Q2.2 ; C12.1 46.546,2.15 46.696,2 v2(46.75,2) ; v2(45.679,8.265) 45.687,8.258 48.417,8.258 LED5.3 ; BUZZER1.3 50.335,35.197 v2(50.773,35.197) ; T1.2 64.236,32.25 LED1.3 ; v2(66.75,4) 66.75,6.575 68.025,7.85 68.025,8.04 68.235,8.25 LED6.3
  Top Layer w0.8: v5(19.5,32.75) 19.504,32.746 19.504,30.915 IC1.40
  Top Layer w1: v5(51.084,22.629) 51.229,22.629 52.147,23.547 52.147,23.798 52.347,23.998 53.498,23.998 v5(53.5,24) ; U1.1 51.751,26.042 52.543,25.25 v5(52.75,25.25)
  Bottom Layer w0.3: v2(36.75,34.75) 37.233,34.267 LCD1.2
  Bottom Layer w0.4: v7(4.902,31.699) 4.902,38.402 5,38.5 5,39.425 v5(4.981,39.444)
  other v1: 3,2 5,2 7,2 9,2 27,2 51,2 53,2 55,2 57,2 59,2 61,2 63,2 65,2 67,2 71,2 73,2 75,2 79,2 2,4 4,4 6,4 46,4 54,4 56,4 58,4 60,4 62,4 68,4 74,4 76,4 78,4 1,6 3,6 5,6 61,6 77,6 79,6 2,8 78,8 1,10 77,10 79,10 2,12 26,12 42,12 46,12 76,12 78,12 59,14 44,16 48,16 62,16 76,16 78,16 27,18 75,18 77,18 44,20 46,20 48,20 62,20 68,20 31,22 28,24 32,24 44,24 46,24 58,24 60,24 62,24 64,24 66,24 68,24 76,24 78,24 62,28 66,28 57,30 46,32 78,32 80,32 45,34 51,34 57,34 59,34 79,34 34,36 36,36 50,36 52,36 56,36 58,36 76,36 78,36 80,36 1,38 3,38 5,38 7,38 13,38 15,38 17,38 31,38 33,38 45,38 47,38 51,38 55,38 57,38 59,38 75,38 79,38 2,40 10,40 26,40 30,40 32,40 34,40 54,40 56,40 58,40 62,40 64,40 66,40 68,40 70,40 72,40 76,40 78,40 80,40
  other v2: 48.768,3.378 38.426,3.4 32.61,3.882 40.874,29.563 41.806,30.624 40.822,30.631 65.25,32.5 21.324,32.632 22.077,32.653 25.414,33.462 65.356,33.523 25.714,34.397 65.117,34.543 19.25,35 22.5,35.5 19.25,35.75 64.878,35.8 21.964,36.003 66.297,36.039 19.25,36.5 21.5,36.75 21,37.25
  other v3: 25.5,20 27,20 28.5,20 25.5,21.5 27,21.5 28.5,21.5 25.5,23 27,23 28.5,23
  other v4: 28.855,29.56 28.052,29.568 30.821,29.564 30,32.75 31.25,32.75 32.5,32.75 33.75,32.75
INT1: IC1.32 R33.2 U2.1 | length 32.4
  Top Layer w0.2: IC1.32 29.75,30.828 29.75,29.5 34.75,24.5 v2(34.75,17.75) ; U2.1 39.252,5.447 39.714,5.909 R33.2 39.714,6.694 40.364,7.344 40.364,10.339 39.662,11.04 v2(39.662,15.529)
  Bottom Layer w0.2: v2(34.75,17.75) 37.442,17.75 v2(39.662,15.529)
K1: IC1.25 R27.2 R30.2 | length 45.7
  Top Layer w0.2: IC1.25 37.974,27.876 v2(39.329,29.231) ; R30.2 73.132,27.603 74.403,27.603 R27.2 74.447,28.264 v2(74.489,28.306)
  Bottom Layer w0.2: v2(39.329,29.231) 40.31,28.25 57.292,28.25 59.46,30.418 59.46,32.205 60.255,33 63.246,33 68.496,27.75 73.933,27.75 v2(74.489,28.306)
K2: IC1.34 R22.2 R24.2 | length 57.9
  Top Layer w0.2: IC1.34 27.178,30.86 v2(27.178,25.705) ; R24.2 R22.2 73.094,23.247 73.981,23.247 v2(73.988,23.254)
  Bottom Layer w0.2: v2(27.178,25.705) 33.884,25.705 35.329,27.15 72.723,27.15 73.988,25.885 v2(73.988,23.254)
K3: IC1.24 R10.2 R11.2 | length 45.6
  Top Layer w0.2: v2(35.738,26.543) 37.204,26.543 IC1.24 ; R10.2 R11.2 73.1,18.377 74.028,18.377 v2(74.041,18.39)
  Bottom Layer w0.2: v2(35.738,26.543) 35.763,26.568 49.439,26.568 57.897,18.11 64.76,18.11 65.04,18.39 v2(74.041,18.39)
K4: IC1.35 R6.2 R8.2 | length 63.5
  Top Layer w0.2: v2(25.857,24.79) IC1.35 ; R8.2 73.094,14.548 74.543,14.548 74.568,14.574 75.584,14.574 v2(75.616,14.605)
  Bottom Layer w0.2: v2(25.857,24.79) 39.057,24.79 40.098,25.832 49.587,25.832 59.574,15.846 ccw(c60.486,16.504) 59.827,15.593 60.775,14.644 60.834,14.585 75.596,14.585 v2(75.616,14.605)
LED: IC1.6 R23.2 | length 29.1
  Top Layer w0.2: v2(24.25,28.25) 24.25,17.25 25.857,15.643 IC1.6 ; R23.2 32.286,37.114 32.286,36.307 v2(32.322,36.272)
  Bottom Layer w0.2: v2(24.25,28.25) 24.25,30.5 30.022,36.272 v2(32.322,36.272)
LED_A: LCD1.1 R25.2 | length 3.1
  Top Layer w0.3: R25.2 R25.2 38.022,35.917 v7(38.024,35.916)
  Bottom Layer w0.3: v7(38.024,35.916) 38.024,35.382 38.639,34.767 LCD1.1
LED_WS: IC1.23 R7.1 | length 35.3
  Top Layer w0.2: IC1.23 38.336,25.336 39,26 v2(39,27.75) ; R7.1 61.024,37.39 61.75,36.665 v2(61.75,32)
  Bottom Layer w0.2: v2(39,27.75) 39.07,27.68 59.436,27.68 61.75,29.994 v2(61.75,32)
MISO: IC1.9 LCD1.5 | length 26
  Top Layer w0.2: IC1.9 29.845,13.589 v2(29.845,27.94)
  Bottom Layer w0.2: v2(29.845,27.94) 32.106,27.94 36.933,32.767 LCD1.5
MOTOR: IC1.8 R1.2 | length 17.5
  Top Layer w0.2: v2(28.321,16.104) 28.321,13.487 IC1.8 ; R1.2 v2(40.691,18.948)
  Bottom Layer w0.2: v2(28.321,16.104) 31.606,19.388 40.251,19.388 v2(40.691,18.948)
NetBUZZER1_2: BUZZER1.2 D2.1 Q2.3 | length 6.2
  Top Layer w0.5: Q2.3 D2.1 46.53,22.347 48.253,24.07 BUZZER1.2
NetC11_1: C11.1 U2.5 | length 5
  Top Layer w0.2: C11.1 33.934,4.299 33.934,4.775 34.909,5.75 36.786,5.75 U2.5@37.639,4.897
NetD1_1: D1.1 P1.2 Q1.3 | length 8.9
  Top Layer w0.5: Q1.3 D1.1 46.495,15.755 48.382,13.868 P1.2
NetLED1_2: LED1.2 LED2.4 | length 89
  Top Layer w0.3: LED2.4 8.433,33.758 v2(8.433,38.125) ; LED1.2 73.765,32.25 75.974,30.041 v2(77,30.041)
  Bottom Layer w0.3: v2(8.433,38.125) 8.407,38.151 8.407,40.208 9.576,41.377 73.123,41.377 77,37.5 v2(77,30.041)
NetLED1_4: LED1.4 R7.2 | length 8.4
  Top Layer w0.3: R7.2 66.65,37.49 68.425,35.715 LED1.4
NetLED2_2: LED2.2 LED3.4 | length 38.4
  Top Layer w0.2: LED3.4 6.185,9.75 1.05,14.885 1.05,29.844 2.161,30.955 13.073,30.955 13.575,31.457 LED2.2
NetLED3_2: LED3.2 LED4.4 | length 19.4
  Top Layer w0.2: LED3.2 17.709,8.25 20.459,5.5 26.145,5.5 27.28,6.634 27.28,9.398 27.632,9.75 LED4.4
NetLED4_2: LED4.2 LED5.4 | length 16.3
  Top Layer w0.2: LED4.2 35,8.25 v2(36,7.25) ; v2(44.879,8.25) 44.879,8.314 46.316,9.75 LED5.4
  Bottom Layer w0.2: v2(36,7.25) 40.25,7.25 41.25,8.25 v2(44.879,8.25)
NetLED5_2: LED5.2 LED6.4 | length 15.7
  Top Layer w0.3: LED5.2 54.808,8.25 55.689,9.131 56.695,9.131 57.597,10.033 65.405,10.033 65.688,9.75 LED6.4
NetQ1_1: Q1.1 R1.1 | length 1.6
  Top Layer w0.2: R1.1 40.723,19.831 42.219,19.831 Q1.1
NetQ2_1: Q2.1 R2.1 | length 1.6
  Top Layer w0.2: R2.1 40.721,23.252 42.222,23.252 Q2.1
NetQ3_1: Q3.1 R8.1 R9.1 | length 2.9
  Top Layer w0.3: Q3.1 69.81,14.518 71.352,14.518 R8.1 R9.1
NetQ4_1: Q4.1 R11.1 R17.1 | length 2.8
  Top Layer w0.3: Q4.1 69.821,18.238 71.099,18.238 71.145,18.285 71.388,18.285 R17.1
NetQ5_1: Q5.1 R23.1 | length 1.8
  Top Layer w0.2: R23.1@32.246,38.729 R23.1@32.25,38.729 ; R23.1 32.292,38.892 33.983,38.892 Q5.1
NetQ5_3: Q5.3 R25.1 | length 2
  Top Layer w0.4: Q5.3 37.29,37.998 37.771,38.479 37.771,38.579 37.921,38.729 R25.1
NetQ6_1: Q6.1 R24.1 R26.1 | length 4.8
  Top Layer w0.2: Q6.1 69.825,21.951 71.337,21.951 R24.1 71.388,22.061 71.915,22.588 71.94,22.588 72.111,22.758 72.111,23.739 71.388,24.462 R26.1
NetQ7_1: Q7.1 R30.1 R31.1 | length 3.2
  Top Layer w0.3: Q7.1 69.974,25.608 70.578,26.213 71.286,26.213 R31.1 R30.1
NetR39_1: R39.1 U2.7 | length 2.3
  Top Layer w0.2: R39.1@35.035,3.978 35.28,4.223 35.398,4.223 35.689,3.932 35.689,3.928 35.806,3.811 U2.7
NetTP1_1: TP1.1 U2.16 | length 13.4
  Top Layer w0.2: U2.16 39.963,1.683 40.359,1.287 47.787,1.287 TP1.1
NetTP2_1: TP2.1 U2.15 | length 34.1
  Top Layer w0.2: 39.226,1.179 U2.15 ; 39.239,1.179 39.531,0.887 67.387,0.887 TP2.1
NetTP3_1: TP3.1 U2.14 | length 75
  Top Layer w0.2: U2.14 38.839,1.001 39.061,0.779 39.073,0.779 39.375,0.477 76.169,0.477 80.493,4.801 80.493,28.007 TP3.1
NetTP4_1: TP4.1 U2.12 | length 68.7
  Top Layer w0.2: TP4.1 3.64,33 0.65,30.01 0.65,11.669 11.865,0.454 37.462,0.454 37.805,0.797 37.817,0.797 38.039,1.019 U2.12
NetTP5_1: TP5.1 U2.11 | length 29.8
  Top Layer w0.2: TP5.1 11,3.224 13.366,0.858 37.3,0.858 37.639,1.197 ; 37.652,1.197 U2.11
NetTP6_1: TP6.1 U2.10 | length 9.7
  Top Layer w0.2: TP6.1 31,2.02 31.714,1.306 36.412,1.306 36.94,1.835 U2.10
RESET: IC1.5 LCD1.3 | length 33.8
  Top Layer w0.2: IC1.5 24.587,15.663 23.5,16.75 23.5,29 23.834,29.334 v2(25.191,29.334)
  Bottom Layer w0.2: v2(25.191,29.334) 29.624,33.767 LCD1.3
RX1: IC1.11 Q9.2 R37.2 R38.1 | length 27.7
  Top Layer w0.2: IC1.11 32.233,13.437 32.233,16.154 v2(32.868,16.789) ; v2(51.003,15.85) 51.111,15.85 51.377,15.584 R37.2
  Top Layer w0.381: R37.2 52.445,15.539 53.716,15.539 Q9.2 53.828,15.495 53.938,15.385 R38.1
  Bottom Layer w0.2: v2(32.868,16.789) 32.976,16.789 33.336,17.15 36.956,17.15 39.177,14.929 50.083,14.929 v2(51.003,15.85)
SCL: IC1.17 R34.2 U2.2 | length 14.6
  Top Layer w0.2: IC1.17 37.567,17.716 38.087,17.196 38.141,17.196 38.317,17.02 38.317,12.734 38.839,12.212 38.839,7.925 ; U2.2 38.839,7.925 ; R34.2@39.638,7.925 38.839,7.925
SCLK: IC1.4 LCD1.6 | length 32.2
  Top Layer w0.2: v2(22.25,25.25) 22.25,16.804 22.967,16.087 22.967,13.761 IC1.4
  Bottom Layer w0.2: v2(22.25,25.25) 23.769,26.769 24.855,26.769 25.336,27.25 32.559,27.25 37.576,32.267 LCD1.6
SDA: IC1.12 R35.2 U2.3 | length 14.6
  Top Layer w0.2: IC1.12 33.572,13.317 33.572,12.478 33.923,12.127 37.878,12.127 38.439,11.566 38.439,6.541 ; R35.2 38.439,6.541 ; U2.3 38.439,6.541
TX1: IC1.10 Q8.2 R29.2 R32.1 | length 30.4
  Top Layer w0.2: IC1.10 30.912,13.437 30.912,17.511 v2(32.189,18.788) ; v2(51,18.25) 51.702,18.25 52.222,18.771 53.685,18.771 R32.1@53.722,18.733
  Top Layer w0.5: R29.2 53.421,20.054 53.6,19.876 53.722,19.876 R32.1@53.722,18.733
  Bottom Layer w0.2: v2(32.189,18.788) 32.628,18.35 40.441,18.35 40.541,18.25 v2(51,18.25)
USBD_N: P2.2 R3.2 | length 6.3
  Top Layer w0.381: R3.2 59.219,8.712 59.219,7.996 59.442,7.772 61.404,7.772 61.442,7.811 63.309,7.811 P2.2
USBD_P: P2.3 R4.2 | length 6.3
  Top Layer w0.381: R4.2 59.237,6.18 59.237,6.914 59.46,7.137 61.667,7.137 61.705,7.176 63.309,7.176 P2.3
USBDR_N: IC1.13 R3.1 | length 32
  Top Layer w0.2: v2(34.454,15.35) 34.531,15.273 34.531,14.91 34.768,14.673 34.806,14.673 35.132,14.347 35.132,14.178 35.097,14.143 35.097,13.761 IC1.13 ; v2(57.022,7.946) 57.098,8.022 57.098,8.202 57.494,8.597 R3.1
  Bottom Layer w0.2: v2(34.454,15.35) 34.454,15.445 35.587,16.578 36.879,16.578 38.928,14.529 53.699,14.529 56.659,11.569 56.659,8.238 56.951,7.946 v2(57.022,7.946)
USBDR_P: IC1.14 R4.1 | length 31.4
  Top Layer w0.2: v2(35.253,15.395) 35.176,15.319 35.176,15.078 35.142,15.044 35.632,14.554 35.632,14.178 35.667,14.143 35.667,13.761 IC1.14 ; v2(57.163,7.027) 57.163,6.918 57.341,6.741 57.341,6.376 R4.1
  Bottom Layer w0.2: v2(35.253,15.395) 35.253,15.494 35.699,15.939 35.699,15.961 35.816,16.078 36.672,16.078 38.721,14.029 53.492,14.029 56.159,11.362 56.159,8.03 56.598,7.592 v2(57.163,7.027)
pads on no net: Hole1.1 Hole2.1 IC1.18 IC1.19 IC1.20 IC1.21 IC1.22 IC1.28 IC1.29 IC1.30 IC1.31 IC1.33 LED6.2 P3. U2.8 U2.9 U2.13 U2.17 U2.18 U2.19

## Polygon pours and split planes (outlines as drawn)
GND on Top Layer "GND_L01_P000" (solid, pour order 0): -0.004,3.004 -0.004,39.004 cw(c2.996,39.004) 2.996,42.004 78.996,42.004 cw(c78.996,39.004) 81.996,39.004 81.996,3.004 cw(c78.996,3.004) 78.996,0.004 2.996,0.004 cw(c2.996,3.004)
GND on Bottom Layer "GND_L02_P001" (solid, pour order 1): -0.004,3.004 -0.004,39.004 cw(c2.996,39.004) 2.996,42.004 78.996,42.004 cw(c78.996,39.004) 81.996,39.004 81.996,3.004 cw(c78.996,3.004) 78.996,0.004 2.996,0.004 cw(c2.996,3.004)

## Keep-outs
Keep-Out Layer:
  the board outline again, w0.2

## Other copper
Top Layer:
  rectangle net +3.3V: 51.816,28.6 56.21,33.892
  region net +3.3V: 43,6.75 42,5.75 42,3.85 44.25,3.85 44.25,6.75
  region net +3.3V: 21.588,7.665 21.588,6.778 22.366,6 23.75,6 22,7.75 21.75,7.75
  pour cut-out: -0.004,37.5 18.567,37.5 18.567,12.751 -0.004,12.751
Bottom Layer:
  rectangle net +3.3V: 51.816,28.6 56.21,33.892
  region net +3.3V: 42,4.8 44.3,4.8 44.5,5 44.5,5.75 44,6.25 42.75,6.25 42,5.5
  pour cut-out: -0.004,37.5 18.567,37.5 18.567,12.751 -0.004,12.751

## Silkscreen, mask and mechanical layers (free items; w line width, h text height)
Top Overlay:
  drawing of 73 lines, arcs and shapes, not listed
  text "1125" at 75.5,40.522 h2
  text "5V" at 12.063,36.969 h1.5 r90
  text "EN" at 17.445,36.891 h1.5 r90
  text "IO0" at 24.942,36.544 h1.5 r90
  text "TX0" at 19.928,36.185 h1.5 r90
  text "RX0" at 22.612,36.105 h1.5 r90
  text "GND" at 14.893,35.7 h1.5 r90
  text "M+" at 47.34,16.822 h1.5
  text "M-" at 47.34,14.282 h1.5
  text "5V" at 61.111,10.892 h1.5
  text "D-" at 61.09,8.322 h1.5
  text "D+" at 61.09,5.572 h1.5
  text "G" at 61.09,3.089 h1.5
Bottom Overlay:
  drawing of 10 lines, arcs and shapes, not listed
  text "U" at 71.546,29.654 h2.2
  text "D" at 11.571,29.629 h2.2
  text "3" at 31.421,5.679 h2.2
  text "M" at 11.696,5.654 h2.2
  text "2" at 51.421,5.654 h2.2
  text "1" at 71.196,5.654 h2.2
Mechanical 15:
  lines w0.1: 24.996,42.004 24.996,24.004 56.996,24.004 56.996,42.004

## Text inside footprints (layer, text, board x,y; h text height)
BUZZER1: Top Overlay "+" at 44.066,26.815 h4 r90